# EAGLE board Robotic Snake (EAGLE 9.7.0)

Size 516 x 159.08 mm. Coordinates in mm from the lower left corner, seen from the top.
Outline: 0,0 516,0 516,159.09 0,159.09 0,0
Copper layers (1*16): Top 0.035mm / dielectric 1.5mm / Bottom 0.035mm
Design rules "default": minimum track width 6mil, minimum drill 0.35mm, track to track 6mil, track to pad 6mil, pad to pad 6mil, via to via 6mil, smd to smd 6mil, copper to edge 40mil, drill to drill 6mil, minimum pad ring 10mil, minimum via ring 8mil, stop-mask expansion 4mil, vias tented up to drill 0mil, thermal gap 10mil

## Footprints (pad centres in the part's own frame; a part is rotated, then mirrored left to right if it is on the bottom)
SG90 = drill 1.016 long: 1 -2.54,0; 2 0,0; 3 2.54,0
ARDUINO-UNO-R3-SHIELD = drill 1.016 pad 1.88: 3.3V 24.13,-2.54; 5V 24.13,0; A0 24.13,12.7; A1 24.13,15.24; A2 24.13,17.78; A3 24.13,20.32; A4 24.13,22.86; A5 24.13,25.4; AREF -24.13,-13.97; D2 -24.13,20.32; D3 -24.13,17.78; D4 -24.13,15.24; D5 -24.13,12.7; D6 -24.13,10.16; D7 -24.13,7.62; D8 -24.13,3.81; D9 -24.13,1.27; D10 -24.13,-1.27; D11 -24.13,-3.81; D12 -24.13,-6.35; D13 -24.13,-8.89; GND@0 24.13,2.54; GND@1 24.13,5.08; GND@2 -24.13,-11.43; IOREF 24.13,-7.62; NC 24.13,-10.16; RES 24.13,-5.08; RX -24.13,25.4; SCL -24.13,-19.05; SDA -24.13,-16.51; TX -24.13,22.86; VIN 24.13,7.62

## Placement (x,y rotation side)
SERVO1  SERVOSG90  [SG90]  6.99,10.09 270 top
SERVO2  SERVOSG90  [SG90]  62.78,9.72 270 top
SERVO3  SERVOSG90  [SG90]  119.9,9.05 270 top
SERVO4  SERVOSG90  [SG90]  177.42,9.03 270 top
SERVO5  SERVOSG90  [SG90]  233.38,8 270 top
SERVO6  SERVOSG90  [SG90]  289.5,7.67 270 top
SERVO7  SERVOSG90  [SG90]  343.28,7.9 270 top
SERVO8  SERVOSG90  [SG90]  397.3,7.16 270 top
SERVO9  SERVOSG90  [SG90]  451.07,7.13 270 top
SERVO10  SERVOSG90  [SG90]  509.72,6.99 270 top
U1  ARDUINO-UNO-R3-SHIELD  [ARDUINO-UNO-R3-SHIELD]  238.02,129.24 90 top

## Library data of the parts
SERVO1-SERVO10 U1 = Tinkercad

## Nets
U1_5V: SERVO1.2 SERVO2.2 SERVO3.2 SERVO4.2 SERVO5.2 SERVO6.2 SERVO7.2 SERVO8.2 SERVO9.2 SERVO10.2 U1.5V
U1_D2: SERVO7.3 U1.D2
U1_D3: SERVO5.3 U1.D3
U1_D4: SERVO6.3 U1.D4
U1_D5: SERVO3.3 U1.D5
U1_D6: SERVO4.3 U1.D6
U1_D7: SERVO8.3 U1.D7
U1_D8: SERVO9.3 U1.D8
U1_D9: SERVO1.3 U1.D9
U1_D10: SERVO2.3 U1.D10
U1_D11: SERVO10.3 U1.D11
U1_GND: SERVO1.1 SERVO2.1 SERVO3.1 SERVO4.1 SERVO5.1 SERVO6.1 SERVO7.1 SERVO8.1 SERVO9.1 SERVO10.1 U1.GND@0 U1.GND@1 U1.GND@2

## Tracks (layer width: path | path; a pad name or v marks a point on that pad's centre or on a via)
U1_5V  (10 unrouted)
U1_D2  (1 unrouted)
U1_D3  (1 unrouted)
U1_D4  (1 unrouted)
U1_D5  (1 unrouted)
U1_D6  (1 unrouted)
U1_D7  (1 unrouted)
U1_D8  (1 unrouted)
U1_D9  (1 unrouted)
U1_D10  (1 unrouted)
U1_D11  (1 unrouted)
U1_GND  (12 unrouted)